# Altium PCB LevelSensor.PcbDoc
Units mil, origin at the board's own origin, x right, y up, seen from the top; angles counter-clockwise.
Board outline 1000 x 4460 mil, 2 copper layers (Top Layer, Bottom Layer); 26 components, 15 nets, 61 pads, 0 vias.
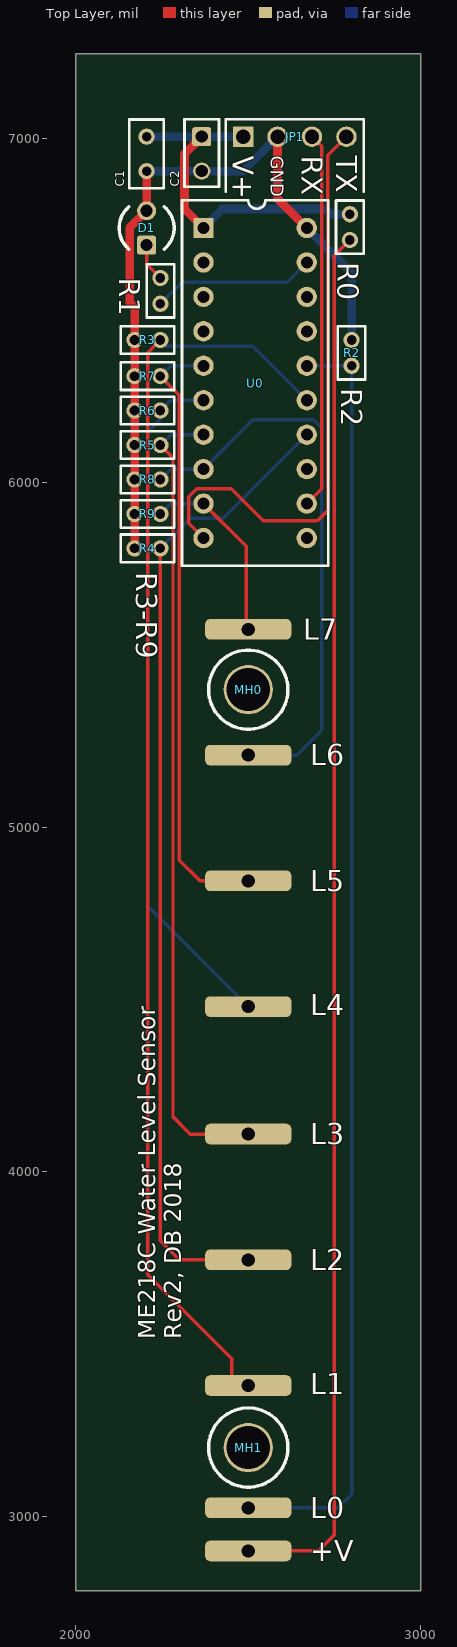
[diagram p0: Top Layer view]
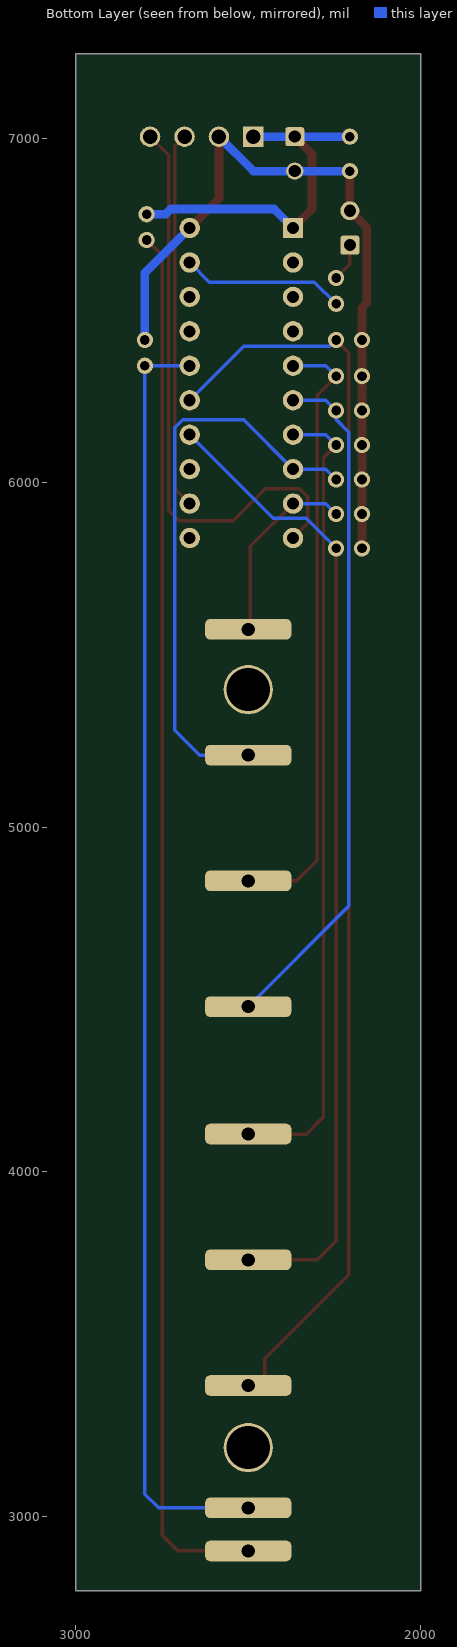
[diagram p1: Bottom Layer view, seen from below]

## Layer stack, top to bottom
Top Solder: solder mask 0.4, Solder Resist, Dk 3.5
Top Layer: signal copper 1.4
Dielectric 1: dielectric 12.6, FR-4, Dk 4.8
Bottom Layer: signal copper 1.4
Bottom Solder: solder mask 0.4, Solder Resist, Dk 3.5

## Board outline
2000,2785 3000,2785 3000,7245 2000,7245

## Design rules (kind name [scope] priority, off if disabled: settings)
Clearance [All] p1: gap=8 ignorepadtopadclearanceinfootprint=FALSE
HoleSize [All] p1: absolutevalues=TRUE maxlimit=200 minlimit=1 maxpercent=80.000 minpercent=20.000
PolygonConnect [All] p1: connectstyle=Relief reliefconductorwidth=10 reliefentries=4 polygonreliefangle="90 Angle" airgapwidth=10
RoutingVias [All] p1: holewidth=25 width=40 viastyle="Through Hole" minholewidth=28 minwidth=50 maxholewidth=28 maxwidth=50
SolderMaskExpansion [All] p1: expansion=4
Width [InNet('+3.3V')] p1: maxlimit=30 minlimit=20 preferedwidth=25 minimp=50.000000 maximp=50.000000 favimp=50.000000
Width Width_1 [All] p2: maxlimit=10 minlimit=10 preferedwidth=10
29 further rules are at their usual default settings.

## Components (designator, comment, footprint, x,y, rotation, side; value= is the part's Value field where it differs from the comment)
+V "Water Pad" WaterPad#1 2500,2900 r180 top (schematic designator +3.3V)
C1 "Cap" RAD-0.1 2205,6955 r90 top value=100pF
C2 "Tant" "10UF_TANTALUM NO CROSS" 2365,7005 r270 top value=10uF
D1 "LED0" DIODE_SMALL 2205,6740 r90 top
JP1 "Molex4" MOLEX_4_PIN 2485,7005 r0 top
L0 "Water Pad" WaterPad#2 2500,3025 r90 top
L1 "Water Pad" WaterPad#2 2500,3380 r90 top
L2 "Water Pad" WaterPad#2 2500,3745 r90 top
L3 "Water Pad" WaterPad#2 2500,4110 r90 top
L4 "Water Pad" WaterPad#2 2500,4480 r90 top
L5 "Water Pad" WaterPad#2 2500,4845 r90 top
L6 "Water Pad" WaterPad#2 2500,5210 r90 top
L7 "Water Pad" WaterPad#2 2500,5575 r90 top
MH0 "4-40 Clearance Hole" "4-40 Clearance Hole" 2500,5400 r0 top
MH1 "4-40 Clearance Hole" "4-40 Clearance Hole" 2500,3200 r0 top
R0 "Res1" Resistor-0.1 2795,6705 r90 top value=1K
R1 "Res1" Resistor-0.1 2245,6595 r270 top value=1K
R2 "R2" Resistor-0.1 2800,6340 r90 top value=1M
R3 "Res1" Resistor-0.1 2245,6415 r180 top value=1M
R4 "Res1" Resistor-0.1 2245,5810 r180 top value=1M
R5 "Res1" Resistor-0.1 2245,6110 r180 top value=1M
R6 "Res1" Resistor-0.1 2245,6210 r180 top value=1M
R7 "Res1" Resistor-0.1 2245,6310 r180 top value=1M
R8 "Res1" Resistor-0.1 2245,6010 r180 top value=1M
R9 "Res1" Resistor-0.1 2245,5910 r180 top value=1M
U0 "PIC16F690-X/P" DIP-20-KEY 2370,6740 r270 top value=Value

## Footprints (in the part's own frame and the unit in brackets; to place one, negate y for a bottom-side part, rotate by r counter-clockwise, add the part's x,y. Pads: shape width x height; smd on the part's side, far side on the other; paste and mask are expansions set on the pad)
"4-40 Clearance Hole" [mil]
  round 143 hole 125 paste+0 mask+0: 27(0,0)
  silkscreen extent -115,-115 115,115
"10UF_TANTALUM NO CROSS" [mil]
  rrect25% 55.12x55.12 hole 35: 1(0,0)
  round 50 hole 35: 2(100,0)
  silkscreen extent -50,-50 145,50
DIODE_SMALL [mm]
  rrect25% 1.4x1.4 hole 0.889: 1(-1.27,0)
  round 1.4 hole 0.889: 2(1.27,0)
  silkscreen extent -1.56,-2.03 1.56,2.03
DIP-20-KEY [mm] "DIP; 20 Leads; Row Spacing 7.62 mm; Pitch 2.54 mm"
  rect 1.5x1.5 hole 0.889: 1(0,0)
  round 1.5 hole 0.889: 2(2.54,0) 3(5.08,0) 4(7.62,0) 5(10.16,0) 6(12.7,0) 7(15.24,0) 8(17.78,0) 9(20.32,0) 10(22.86,0) 11(22.86,7.62) 12(20.32,7.62) 13(17.78,7.62) 14(15.24,7.62) 15(12.7,7.62) 16(10.16,7.62) 17(7.62,7.62) 18(5.08,7.62) 19(2.54,7.62) 20(0,7.62)
  silkscreen extent -2.05,-1.59 24.89,9.2
MOLEX_4_PIN [mil]
  rect 59.5x59.5 hole 42: 1(0,0)
  round 59.5 hole 42: 2(100,0) 3(200,0) 4(300,0)
  silkscreen extent -50,-160 350,50
RAD-0.1 [mm] "Radial Cap, Thru-Hole; 2 Leads; 0.1 in Pin Spacing"
  round 1.2 hole 0.711: 1(-1.27,0) 2(1.27,0)
  silkscreen extent -2.54,-1.27 2.54,1.27
Resistor-0.1 [mm] "Resistor, Thru-Hole; 2 Leads; 0.1 in Pin Spacing"
  round 1.2 hole 0.711: 1(0,0) 2(1.905,0)
  silkscreen extent -1.02,-1.02 2.92,1.02
WaterPad#1 [mil]
  rrect50% 250x60 hole 38: 0(0,0)
WaterPad#2 [mil]
  rrect50% 60x250 hole 38: 0(0,0)

## Part data
C1: "Capacitor", Manufacturer="Generic Components", Class=Passive, Published=08/06/2000, Publisher="Altium Hobart Technology Centre", SubClass=Capacitor
C2: library part "Cap Pol1", "Polarized Capacitor (Radial)", Manufacturer="Generic Components", Class=Passive, Published=08/06/2000, Publisher="Altium Hobart Technology Centre", SubClass=Capacitor
D1: "Typical INFRARED GaAs LED", LatestRevisionDate=08-Jul-2005, LatestRevisionNote="Mech Layer 1 removed.", PackageDescription="LED; 2 Leads", PackageReference=LED-0, Published=8-Jun-2000, Publisher="Altium Limited"
JP1: "Header, 4-Pin", Manufacturer="Generic Components", Class=Connector
R0 R1 R3 R4 R5 R6 R7 R8 R9: "Resistor", LatestRevisionDate=17-Jul-2002, LatestRevisionNote="Re-released for DXP Platform.", PackageDescription="Axial Device, Thru-Hole; 2 Leads; 0.3 in Pin Spacing", PackageReference=AXIAL-0.3, Published=8-Jun-2000, Publisher="Altium Limited"
R2: library part Res1, "Resistor", LatestRevisionDate=17-Jul-2002, LatestRevisionNote="Re-released for DXP Platform.", PackageDescription="Axial Device, Thru-Hole; 2 Leads; 0.3 in Pin Spacing", PackageReference=AXIAL-0.3, Published=8-Jun-2000, Publisher="Altium Limited"
U0: "Imported", Built_By=EMA_UL_Team, C="Copyright (C) 2015 Accelerated Designs. All rights reserved", Manufacturer_Part_Number=PIC16F690-X/P, RefDes=RefDes, Type=DEV, Vendor=Microchip

## Nets (pads, with @x,y where several pads share a name; then routed paths per layer and width w, separated by ;. In a path a pad name is that pad's centre, name@x,y a point inside that pad or via, vN(x,y) a via of type N, cw(c..) or ccw(c..) an arc to the next point about the centre after c; other vN are vias at no path point)
+3.3V: C1.2 C2.1 JP1.1 R0.2 U0.1 | length 1042.5
  Top Layer w25: C2.1 2315,6955 2315,6795 U0.1
  Bottom Layer w25: C1.2 C2.1 JP1.1 ; U0.1 2425,6795 2725,6795 2740,6780 R0.2
GND: C1.1 C2.2 D1.2 JP1.2 R2.2 R3.2 R4.2 R5.2 R6.2 R7.2 R8.2 R9.2 U0.20 | length 2221.6
  Top Layer w25: R4.2 R9.2 R8.2 R5.2 R6.2 R7.2 R3.2 2170,6509 2156,6523 2156,6741 D1.2 C1.1 ; JP1.2 2585,6825 U0.20
  Bottom Layer w25: C1.1 C2.2 2485,6905 JP1.2 ; U0.20 2800,6610 R2.2
Net+V_0: +V.0 R0.1 | length 4046.7
  Top Layer w10: +V.0 2704,2900 2749,2945 2749,6659 R0.1
NetD1_1: D1.1 R1.1 | length 111.6
  Top Layer w10: D1.1 2205,6635 R1.1
NetR1_2: R1.2 U0.19 | length 474.7
  Bottom Layer w10: R1.2 2308,6583 2613,6583 U0.19
Pad0: L0.0 R2.1 U0.16 | length 3721.6
  Bottom Layer w10: L0.0 2760,3025 2800,3065 R2.1 U0.16
Pad1: L1.0 R3.1 U0.15 | length 3696.9
  Top Layer w10: R3.1 2208,6378 2208,3702 2452,3458 2452,3380 L1.0
  Bottom Layer w10: R3.1 2263,6397 2513,6397 U0.15
Pad2: L2.0 R4.1 U0.14 | length 2849.5
  Top Layer w10: R4.1 2245,3800 2300,3745 L2.0
  Bottom Layer w10: R4.1 2332,5897 2427,5897 U0.14
Pad3: L3.0 R5.1 U0.7 | length 2341.7
  Top Layer w10: R5.1 2281.62,6073.38 2281.62,4160 2331.62,4110 L3.0
  Bottom Layer w10: R5.1 2275,6140 U0.7
Pad4: L4.0 R6.1 U0.6 | length 2003.7
  Bottom Layer w10: U0.6 2275,6240 R6.1 2245,6184 2208,6147 2208,4772 L4.0
Pad5: L5.0 R7.1 U0.5 | length 1790.1
  Top Layer w10: R7.1 2300,6255 2300,4905 2360,4845 L5.0
  Bottom Layer w10: R7.1 2275,6340 U0.5
Pad6: L6.0 R8.1 U0.8 | length 1670
  Bottom Layer w10: R8.1 2275,6040 U0.8 2513,6183 2690,6183 2713,6160 2713,5282 2641,5210 L6.0
Pad7: L7.0 R9.1 U0.9 | length 559.8
  Top Layer w10: U0.9 2494,5816 2494,5575 L7.0
  Bottom Layer w10: R9.1 2275,5940 U0.9
UART_RX: JP1.3 U0.12 | length 1094.4
  Top Layer w10: U0.12 2713,5983 2713,6977 JP1.3
UART_TX: JP1.4 U0.10 | length 1709.7
  Top Layer w10: U0.10 2327,5883 2327,5960 2350,5983 2451,5983 2544,5890 2701,5890 2731,5920 2731,6951 JP1.4
pads on no net: MH0.27 MH1.27 U0.2 U0.3 U0.4 U0.11 U0.13 U0.17 U0.18

## Silkscreen, mask and mechanical layers (free items; w line width, h text height)
Top Overlay:
  text "R3-R9" at 2175,5740 h60 r270
  text "ME218C Water Level Sensor / Rev2, DB 2018" at 2305,3515 h50 r90
Mechanical 1:
  lines w10: 2095,2830 2870,2830 2870,7080 2605,7080 2205,7080 2095,7080 2095,2830
Mechanical 5:
  lines w10: 2500,2845 2500,5800
Drill Drawing:
  text ".LEGEND" at 3200,3200 h60
  text "Drill Drawing." at 3200,3100 h60

## Dimensions
2095,2830 to 2870,2830 on Mechanical 1
2095,2830 to 2095,7080 on Mechanical 1

## Text inside footprints (layer, text, board x,y; h text height)
JP1: Top Overlay "V+" at 2455,6950 h60 r270; Top Overlay "GND" at 2565,6950 h38 r270; Top Overlay "RX" at 2655,6950 h60 r270; Top Overlay "TX" at 2755,6950 h60 r270